# Altium PCB CH340G_VCC.PcbDoc
Units mm, origin at the board's own origin, x right, y up, seen from the top; angles counter-clockwise.
Board outline 41.53 x 19.18 mm, 2 copper layers (Top Layer, Bottom Layer); 36 components, 24 nets, 124 pads, 51 vias.
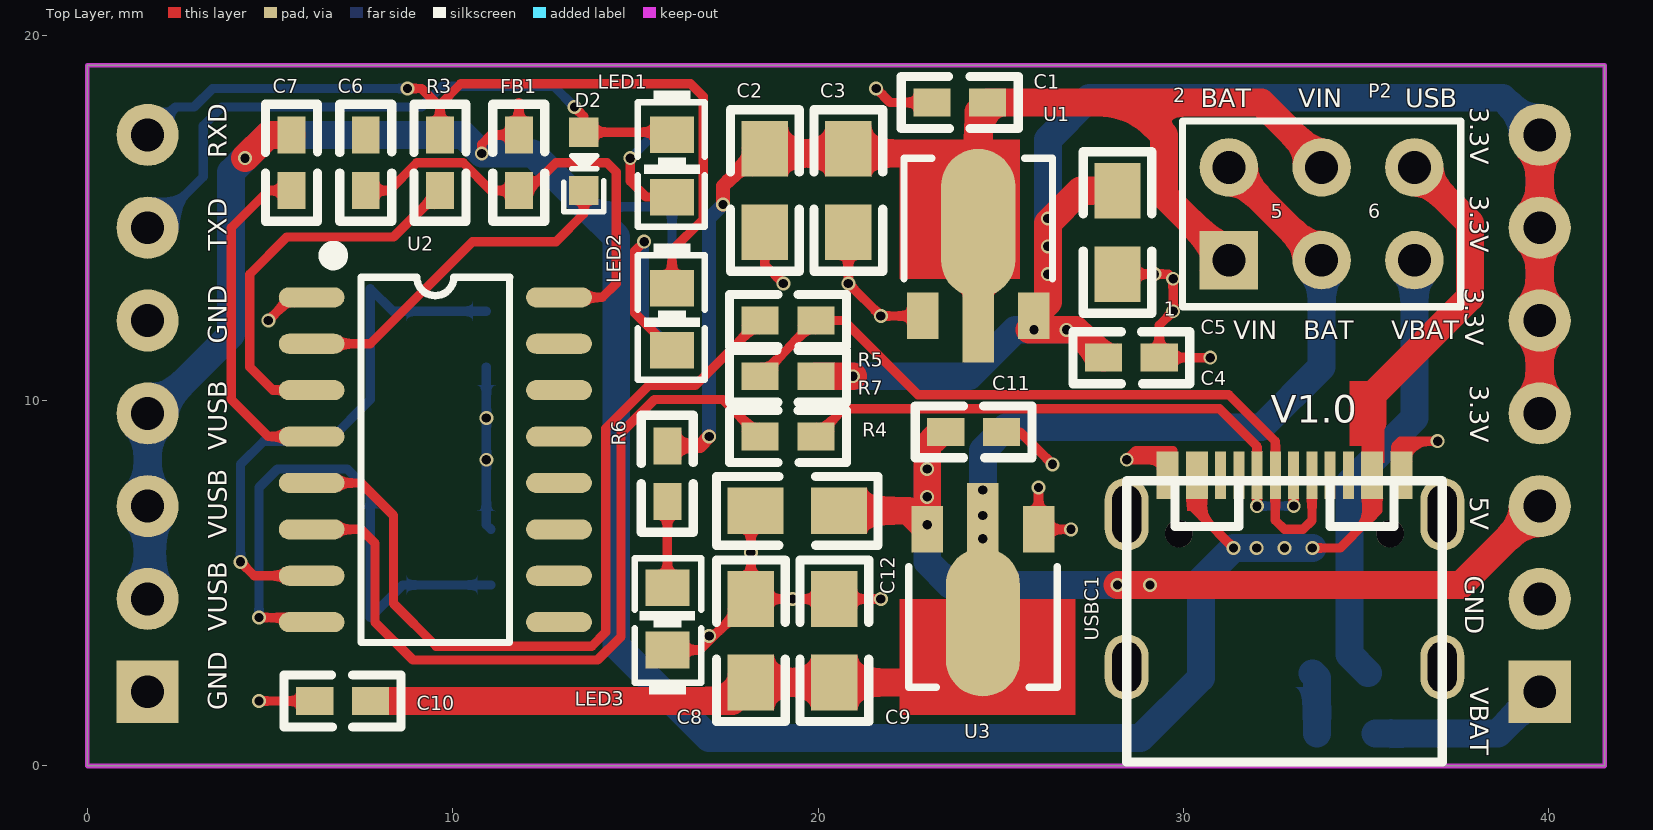
[diagram p0: Top Layer view]
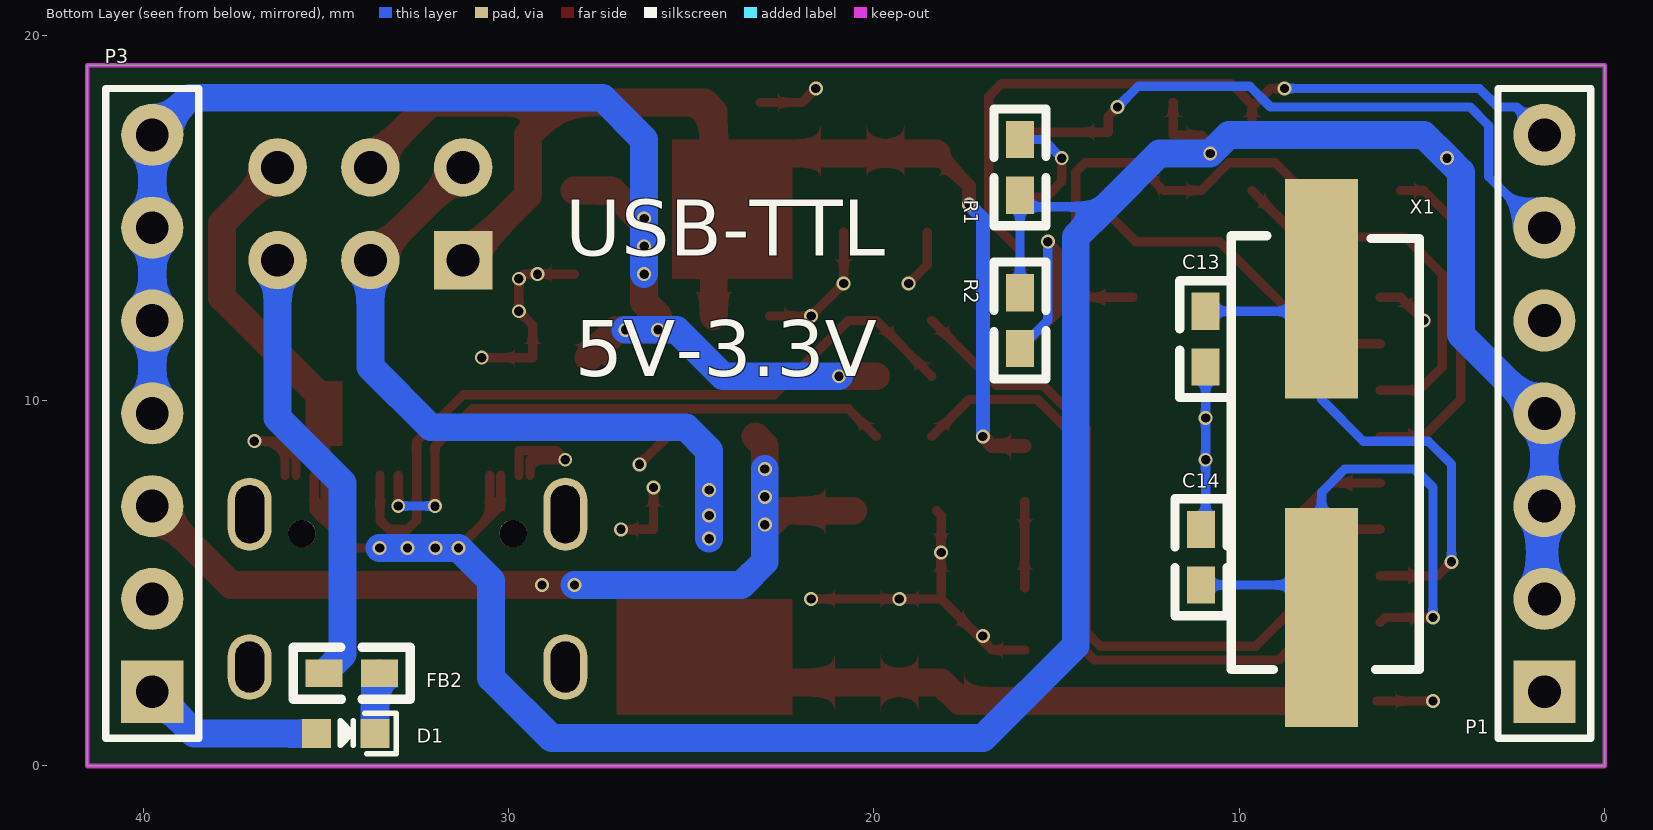
[diagram p1: Bottom Layer view, seen from below]

## Layer stack, top to bottom
Top Solder: solder mask 0.0102, Solder Resist, Dk 3.5
Top Layer: signal copper 0.0356
Dielectric 1: dielectric 0.32, FR-4, Dk 4.8
Bottom Layer: signal copper 0.0356
Bottom Solder: solder mask 0.0102, Solder Resist, Dk 3.5

## Board outline
0,0 41.529,0 41.529,19.177 0,19.177

## Design rules (kind name [scope] priority, off if disabled: settings)
Clearance [All] p1: gap=0.127 ignorepadtopadclearanceinfootprint=TRUE
PolygonConnect [All] p1: connectstyle=Relief reliefconductorwidth=0.254 reliefentries=4 polygonreliefangle="90 Angle" airgapwidth=0.254
RoutingVias [All] p1: holewidth=0.711 width=1.27 viastyle="Through Hole" minholewidth=0.711 minwidth=1.27 maxholewidth=0.711 maxwidth=1.27
SolderMaskExpansion [All] p1: expansion=0.102
Width [All] p1: maxlimit=1.27 minlimit=0.254 preferedwidth=0.254
30 further rules are at their usual default settings.

## Components (designator, comment, footprint, x,y, rotation, side; value= is the part's Value field where it differs from the comment)
C1 "CC0603KRX7R9BB104" C0603_QB 23.066,18.164 r0 top value="100nF, 50V"
C2 "CC0603KRX7R9BB104" C0805_1.25mm_QB 18.542,14.605 r90 top value="22uF, 50V"
C3 "CC0603KRX7R9BB104" C0805_1.25mm_QB 20.828,14.605 r90 top value="22uF, 50V"
C4 "CC0603KRX7R9BB104" C0603_QB 29.385,11.173 r180 top value="100nF, 50V"
C5 "CC0603KRX7R9BB104" C0805_1.25mm_QB 28.194,13.462 r90 top value="22uF, 50V"
C6 "CC0603KRX7R9BB104" C0603_QB 7.623,17.32 r270 top value=0.1uF
C7 "CC0603KRX7R9BB104" C0603_QB 5.591,17.32 r270 top value="100nF, 50V"
C8 "CC0603KRX7R9BB104" C0805_1.25mm_QB 18.161,4.572 r270 top value="22uF, 50V"
C9 "CC0603KRX7R9BB104" C0805_1.25mm_QB 20.447,4.572 r270 top value="22uF, 50V"
C10 "CC0603KRX7R9BB104" C0603_QB 6.175,1.781 r0 top value="100nF, 50V"
C11 "CC0603KRX7R9BB104" C0603_QB 25.067,9.141 r180 top value="100nF, 50V"
C12 "CC0603KRX7R9BB104" C0805_1.25mm_QB 18.288,6.985 r0 top value="22uF, 50V"
C13 "CC0603KRX7R9BB104" C0603_QB 10.925,10.874 r90 bottom value="22pF, 25V"
C14 "CC0603KRX7R9BB104" C0603_QB 11.046,6.525 r270 bottom value="22pF, 25V"
D1 "1N4148" SOD_523_QB 33.655,0.889 r0 bottom
D2 "1N4148" SOD_523_QB 13.589,15.748 r90 top
FB1 "CBG160808U182" FB0603_QB 11.811,17.272 r270 top value=500mA
FB2 "CBG160808U182" FB0603_QB 35.052,2.54 r180 bottom value=500mA
LED1 "19-217/R6C-AL1M2VY/3T" LED_SMT_QB 16.002,15.572 r90 top value=5V，25mA，红色，0603
LED2 "19-217/R6C-AL1M2VY/3T" LED_SMT_QB 16.002,11.381 r90 top value=5V，25mA，红色，0603
LED3 "19-217/R6C-AL1M2VY/3T" LED_SMT_QB 15.875,4.875 r270 top value=5V，25mA，红色，0603
P1 "Hard_5*1" HDR2.54-LI-4P 1.651,5.842 r90 bottom
P2 "Hard-3*2" HDR2.54-LI-2x3P 33.782,15.113 r0 top
P3 "Hard_5*1" HDR2.54-LI-4P 39.751,5.842 r90 bottom
R1 "RC0603JR-07470RL" R0603_QB 16.002,17.145 r270 bottom value=470R
R2 "RC0603JR-07470RL" R0603_QB 16.002,11.43 r90 bottom value=470R
R3 "RC0603JR-07470RL" R0603_QB 9.652,17.272 r270 top value=300
R4 "RC0603JR-07470RL" C0603_QB 19.987,9.014 r180 top value=22R
R5 "RC0603JR-07470RL" C0603_QB 19.987,12.189 r180 top value=22R
R6 "RC0603JR-07470RL" R0603_QB 15.875,8.763 r270 top value=470R
R7 "RC0603JR-07470RL" R0603_QB 18.415,10.668 r0 top value=1.5K
U1 "MD5333(SOT-89)" SOT_89_QB 22.86,12.319 r0 top value=MD5333
U2 "CH340G" SOP16N_N 9.525,8.382 r0 top
U3 "MD5350(SOT-89)" SOT_89_QB 26.035,6.477 r180 top value=MD5350
USBC1 "USB3.1C16PFSMT" TYPE-C-USB-17 32.766,5.334 r0 top
X1 "12MHz" ESB3.68640F20M23_QB 7.747,13.064 r270 bottom value=FC-135,32.768KHz,12.5pF,20ppm

## Footprints (in the part's own frame and the unit in brackets; to place one, negate y for a bottom-side part, rotate by r counter-clockwise, add the part's x,y. Pads: shape width x height; smd on the part's side, far side on the other; paste and mask are expansions set on the pad)
C0603_QB [mil]
  rect 40x30 smd: 1(1.9,-0.1) 2(61.9,-0.1)
  silkscreen extent -31,-28 95,28, body extent 0,-17 64,17, height 35
C0805_1.25mm_QB [mil]
  rect 60x50 smd: 1(0,0) 2(90,0)
  silkscreen extent -42,-37 132,37, body extent 6,-25 85,24, height 49
ESB3.68640F20M23_QB [mm]
  rect 6x2 smd: 1(0,0) 2(9,0)
  silkscreen extent -1.45,-2.47 10.43,2.68, body extent -1.2,-2.25 10.2,2.45, height 3
FB0603_QB [mil]
  rect 40x30 smd: 1(0,0) 2(60,0)
  silkscreen extent -33,-28 93,28, body extent 0,-17 63,17, height 35
HDR2.54-LI-2x3P [mm] "双排排针，3x2脚"
  rect 1.6x1.6 hole 0.9: 1(-2.54,-1.27)
  round 1.6 hole 0.9: 2(-2.54,1.27) 3(0,-1.27) 4(0,1.27) 5(2.54,-1.27) 6(2.54,1.27)
  silkscreen extent -3.81,-2.54 3.81,2.54, body extent -3.81,-2.54 3.81,2.54, height 8.5
HDR2.54-LI-4P [mm] "排针，4脚"
  rect 1.7x1.7 hole 0.9: 1(-3.81,0)
  round 1.7 hole 0.9: 2(-1.27,0) 3(1.27,0) 4(3.81,0) 5(6.35,0) 6(8.89,0) 7(11.43,0)
  silkscreen extent -5.08,-1.27 12.7,1.27, body extent -5.08,-1.27 12.7,1.27, height 8.5
LED_SMT_QB [mm]
  rect 1x1.2 smd: 1(0,0) 2(1.7,0)
  silkscreen extent -0.81,-0.9 2.92,0.93, body extent 0,-0.51 1.78,0.51, height 0.6
R0603_QB [mil]
  rect 40x30 smd: 1(0,0) 2(60,0)
  silkscreen extent -33,-28 93,28, body extent 0,-17 63,17, height 35
SOD_523_QB [mm]
  rect 0.8x0.8 smd: 1(1.6,0) 2(0,0)
  silkscreen extent -0.57,-0.55 0.95,0.55, body extent -0.13,-0.43 1.63,0.43, height 0.65
SOP16N_N [mm] "10.3*7*1.8mm（长宽高）"
  oval 1.8x0.55 smd: 1(-3.385,4.445) 2(-3.385,3.175) 3(-3.385,1.905) 4(-3.385,0.635) 5(-3.385,-0.635) 6(-3.385,-1.905) 7(-3.385,-3.175) 8(-3.385,-4.445) 9(3.385,-4.445) 10(3.385,-3.175) 11(3.385,-1.905) 12(3.385,-0.635) 13(3.385,0.635) 14(3.385,1.905) 15(3.385,3.175) 16(3.385,4.445)
  silkscreen extent -2.95,-5 2.03,5.74, body extent -3.5,-5.25 3.5,5.25, height 1.9
SOT_89_QB [mil]
  rect 34x50 smd: 1(0,0) 3(120,0)
  rect 34x100 smd: 2(60,0)
  oval 80x160 smd: 2(60,100)
  silkscreen extent -20,40 140,170, body extent -29,-12 149,175, height 63
TYPE-C-USB-17 [mm]
  oval 1.2x1.8 hole 0.8 slot 1.4 at 90 deg: 0(-4.32,-2.624) 0(4.32,-2.624)
  oval 1.2x2 hole 0.8 slot 1.6 at 90 deg: 0(-4.32,1.556) 0(4.32,1.556)
  rect 0.3x1.3 smd: A1(-3.35,2.623) A4(-2.55,2.623) A5(-1.25,2.623) A6(-0.25,2.623) A7(0.25,2.623) A8(-1.75,2.624) A9(2.55,2.623) A12(3.35,2.623) B1(3.05,2.623) B4(2.25,2.623) B5(1.75,2.623) B6(0.75,2.623) B7(-0.75,2.623) B8(1.25,2.624) B9(-2.25,2.623) B12(-3.05,2.623)
  round 0.75 hole 0.75 unplated: ""(-2.89,1.026) ""(2.89,1.026)
  silkscreen extent -4.32,-5.23 4.32,2.47

## Part data
C1 C2 C3 C4 C5 C6 C7 C8 C9 C10 C11 C12 C13 C14: library part CAP, "Capacitor", Manufacturer=国巨, PartNo=11002050002
D1 D2: library part diode
FB1 FB2: library part FB, "Inductor", Manufacturer=HOLDER, PartNo_new=11014060007
LED1 LED2 LED3: library part LED, Manufacturer=亿光, PartNo=11004030004
R1 R2 R3 R4 R5 R6 R7: library part Res1, "Resistor", Manufacturer=国巨, PartNo=11003020066
U1: library part MD5333, "LDO", Manufacturer=明达微, PartNo=11001090038
U3: library part MD5350, "LDO", Manufacturer=明达微, PartNo=11001090038
X1: library part XTAL, "Crystal Oscillator", Manufacturer=EPSON, PartNo=11012040004

## Via types
v1: diameter 0.381, hole 0.254, Top Layer to Bottom Layer, 51 vias

## Nets (pads, with @x,y where several pads share a name; then routed paths per layer and width w, separated by ;. In a path a pad name is that pad's centre, name@x,y a point inside that pad or via, vN(x,y) a via of type N, cw(c..) or ccw(c..) an arc to the next point about the centre after c; other vN are vias at no path point)
BAT: C8.2 C9.2 C10.2 P2.2 P2.3 U3.2 | length 36.8
  Top Layer w0.762: C10.2 17.653,1.778 C8.2 C9.2 22.86,2.286 U3.2@24.511,3.937 ; P2.2 P2.3
  Bottom Layer w0.762: v1(24.511,6.223) v1(24.511,6.858) v1(24.511,7.556) 24.511,8.636 25.146,9.271 32.131,9.271 33.782,10.922 P2.3
DN: R4.1 USBC1.A7 USBC1.B7 | length 16.3
  Top Layer w0.254: R4.1 20.701,9.779 30.988,9.779 32.016,8.751 USBC1.B7 v1(32.016,7.112) ; USBC1.A7 33.016,7.12 v1(33.02,7.116)
  Bottom Layer w0.254: v1(32.016,7.112) 32.02,7.116 v1(33.02,7.116)
DP: R5.1 R7.1 USBC1.A6 USBC1.B6 | length 20.7
  Top Layer w0.254: R7.1 R5.1 20.701,12.192 22.733,10.16 31.242,10.16 32.516,8.886 32.516,8.796 USBC1.A6 32.516,6.727 32.766,6.477 33.274,6.477 33.516,6.719 USBC1.B6
GND: C1.1 C2.1 C3.1 C4.1 C5.1 C6.1 C8.1 C9.1 C10.1 C11.1 C12.1 C13.1 C14.1 LED3.2 P1.1 P1.5 P3.2 U1.1 U2.1 U3.1 USBC1.A1 USBC1.A12 USBC1.B1 USBC1.B12 | length 39.6
  Top Layer w0.254: v1(4.699,1.778) C10.1 ; v1(4.953,12.192) 5.588,12.827 U2.1 ; LED3.2 16.764,3.175 C8.1 ; C12.1 18.161,6.858 v1(18.161,5.842) C8.1 ; C2.1 18.542,13.716 v1(19.05,13.208) ; C3.1 v1(20.828,13.208) v1(21.717,12.319) U1.1 ; v1(21.59,18.542) 21.971,18.161 C1.1 ; v1(21.717,4.572) C9.1 v1(19.304,4.572) C8.1 ; C11.1 25.527,9.144 v1(26.416,8.255) ; v1(26.035,7.62) U3.1 v1(26.924,6.477) ; C5.1 v1(29.21,13.462) 29.591,13.462 v1(29.718,13.335) v1(29.718,12.446) 29.337,12.065 C4.1 v1(30.734,11.176) ; USBC1.A1 29.416,8.382 v1(28.448,8.382) 28.702,8.636 29.716,8.636 USBC1.B12 ; USBC1.B1 USBC1.B1@35.816,8.511 ; USBC1.A12 36.116,8.557 36.449,8.89 ; v1(36.957,8.89) 36.449,8.89 ; USBC1.B1@35.816,8.511 36.195,8.89 ; USBC1.B1@35.816,8.511 35.816,8.765 35.941,8.89 36.195,8.89 ; 36.195,8.89 36.449,8.89
  Bottom Layer w0.254: C13.1 v1(10.922,9.525) v1(10.922,8.382) 10.922,6.604 C14.1
  other v1: 17.018,3.556
NetC6_2: C6.2 FB1.2 U2.16 | length 12.7
  Top Layer w0.254: C6.2 8.255,15.748 9.017,16.51 10.287,16.51 11.049,15.748 FB1.2 12.065,15.748 12.827,16.51 14.224,16.51 14.478,16.256 14.478,13.208 14.097,12.827 U2.16
NetC7_2: C7.2 U2.4 | length 9.4
  Top Layer w0.254: C7.2 4.953,15.748 3.937,14.732 3.937,10.033 4.953,9.017 U2.4
NetC13_2: C13.2 U2.7 X1.1 | length 15.5
  Top Layer w0.254: v1(4.191,5.588) 4.572,5.207 U2.7
  Bottom Layer w0.254: v1(4.191,5.588) 4.191,8.255 4.826,8.89 6.604,8.89 7.747,10.033 X1.1 8.365,12.446 C13.2
NetC14_2: C14.2 U2.8 X1.2 | length 15.7
  Top Layer w0.254: v1(4.699,4.064) 6.013,4.064 U2.8
  Bottom Layer w0.254: v1(4.699,4.064) 4.699,7.62 5.207,8.128 7.112,8.128 7.747,7.493 X1.2 8.636,4.953 C14.2
NetD1_2: D1.2 FB2.2 | length 1.7
  Bottom Layer w0.762: FB2.2 33.655,2.413 D1.2
NetD2_2: D2.2 U2.2 | length 9.6
  Top Layer w0.254: U2.2 7.747,11.557 10.541,14.351 12.827,14.351 13.589,15.113 D2.2
NetFB2_1: FB2.1 P2.5 | length 12.2
  Bottom Layer w0.762: FB2.1 34.544,3.048 34.544,7.747 36.322,9.525 P2.5
NetLED1_1: LED1.1 R1.1 | length 3.3
  Top Layer w0.254: v1(14.859,16.637) 14.859,16.002 15.289,15.572 LED1.1
  Bottom Layer w0.254: v1(14.859,16.637) 15.367,17.145 R1.1
NetLED2_1: LED2.1 R2.1 | length 6.7
  Top Layer w0.254: v1(15.24,14.351) 14.986,14.097 14.986,12.397 LED2.1
  Bottom Layer w0.254: v1(15.24,14.351) 15.24,12.192 R2.1
NetLED3_1: LED3.1 R6.2 | length 2.4
  Top Layer w0.254: LED3.1 R6.2
NetR3_2: R3.2 U2.3 | length 10.7
  Top Layer w0.254: U2.3 5.08,10.287 4.445,10.922 4.445,13.462 5.461,14.478 8.382,14.478 R3.2
RXD: LED2.2 P1.7 R3.1 | length 22.7
  Top Layer w0.254: v1(8.763,18.542) 9.144,18.542 9.652,18.034 ; R3.1 9.652,18.034 ; LED2.2 16.002,14.113 16.856,14.967 16.856,18.323 16.51,18.669 10.223,18.669 9.652,18.098 9.652,18.034
  Bottom Layer w0.254: P1.7 2.413,18.034 2.921,18.034 3.429,18.542 v1(8.763,18.542)
TXD: D2.1 LED1.2 P1.6 | length 17.6
  Top Layer w0.254: v1(13.335,18.034) 13.589,17.78 D2.1 15.926,17.348 LED1.2
  Bottom Layer w0.254: P1.6 1.778,14.732 3.175,16.129 3.175,17.526 3.683,18.034 9.144,18.034 9.716,18.605 12.763,18.605 v1(13.335,18.034)
USBD+: R5.2 U2.5 | length 22.5
  Top Layer w0.254: U2.5 7.493,7.747 8.382,6.858 8.382,4.445 9.546,3.281 13.807,3.281 14.191,3.665 14.191,9.238 15.367,10.414 16.637,10.414 R5.2
USBD-: R4.2 U2.6 | length 21.7
  Top Layer w0.254: U2.6 7.493,6.477 7.874,6.096 7.874,3.937 8.911,2.9 13.965,2.9 14.605,3.54 14.605,9.113 15.525,10.033 17.399,10.033 R4.2
VCC3V3: C4.2 C5.2 P3.4 P3.5 P3.6 P3.7 R7.2 U1.3 | length 48
  Top Layer w0.762: R7.2 v1(20.955,10.668) ; U1.3@25.781,11.938 v1(25.908,11.938) v1(26.797,11.938) 27.051,11.938 C4.2 ; U1.3 26.289,12.7 v1(26.289,13.462) v1(26.289,14.224) 26.289,14.859 27.178,15.748 C5.2 ; P3.4 P3.5 P3.6 P3.7
  Bottom Layer w0.762: v1(20.955,10.668) 24.13,10.668 25.4,11.938 v1(25.908,11.938) v1(26.797,11.938) ; v1(26.289,13.462) v1(26.289,14.224) v1(26.289,14.986) 26.289,17.145 27.432,18.288 38.735,18.288 P3.7 P3.6 P3.5 P3.4
VCC5V: C11.2 C12.2 P3.3 U3.3 | length 25.7
  Top Layer w0.762: C12.2 22.479,6.985 U3.3 v1(22.987,6.604) v1(22.987,7.366) v1(22.987,8.128) 22.987,8.763 C11.2@23.241,9.017 ; v1(28.194,4.953) v1(29.083,4.953) 37.592,4.953 P3.3
  Bottom Layer w0.762: v1(22.987,8.128) v1(22.987,7.366) v1(22.987,6.604) 22.987,5.588 23.622,4.953 v1(28.194,4.953)
VCCBAT: D1.1 P3.1 | length 5
  Bottom Layer w0.762: D1.1 38.608,0.889 P3.1
VCCIN: C1.2 C2.2 C3.2 P2.1 P2.4 R6.1 U1.2 | length 37.7
  Top Layer w0.381: R6.1 16.764,8.763 v1(17.018,9.017) ; v1(17.399,15.367) 17.399,15.875 C2.2@18.288,16.764
  Top Layer w0.762: C2.2@18.288,16.764 22.479,16.764 U1.2@24.384,14.859 ; U1.2@24.384,12.319 U1.2@24.384,14.859 ; P2.1 29.464,15.621 29.464,17.272 28.575,18.161 ; P2.4 33.782,16.51 32.131,18.161 28.575,18.161 ; U1.2@24.384,14.859 24.384,17.907 C1.2 28.575,18.161
  Bottom Layer w0.381: v1(17.018,9.017) 17.018,14.986 v1(17.399,15.367)
VCCUSB: C7.1 FB1.1 P1.2 P1.3 P1.4 P2.6 R1.2 R2.2 USBC1.A4 USBC1.A9 USBC1.B4 USBC1.B9 | length 89.2
  Top Layer w0.254: v1(10.795,16.764) 10.795,17.018 11.049,17.272 FB1.1 11.811,18.161 ; USBC1.A4 30.216,7.122 30.516,6.822 ; USBC1.B9 30.516,6.822 ; v1(31.369,5.969) 30.516,6.822 ; v1(33.528,5.969) 34.29,5.969 35.016,6.695 ; 35.016,9.108 USBC1.B4 35.016,6.695 ; USBC1.A9 35.316,6.995 35.016,6.695
  Top Layer w0.762: v1(4.318,16.637) 4.953,17.272 C7.1 ; 35.179,9.398 35.179,10.16 37.846,12.827 37.846,14.859 P2.6
  Bottom Layer w0.254: 13.652,15.303 15.684,15.303 R1.2 R2.2
  Bottom Layer w0.762: P1.2 P1.3 P1.4 1.778,9.652 3.937,11.811 3.937,16.256 v1(4.318,16.637) 4.953,17.272 10.287,17.272 v1(10.795,16.764) 12.192,16.764 13.652,15.303 14.478,14.478 14.478,3.302 17.018,0.762 28.829,0.762 30.48,2.413 30.48,5.08 v1(31.369,5.969) v1(32.004,5.969) v1(32.766,5.969) v1(33.528,5.969) ; P1.2@1.778,4.572 P1.3@1.778,7.112
pads on no net: U2.9 U2.10 U2.11 U2.12 U2.13 U2.14 U2.15 USBC1. USBC1.0 USBC1.A5 USBC1.A8 USBC1.B5 USBC1.B8

## Keep-outs
Keep-Out Layer:
  the board outline again, w0.127

## Other copper
Top Layer:
  rectangle net VCCUSB: 34.925,8.382 35.342,10.033
  rectangle net VCCUSB: 35.088,8.291 35.505,9.942
  rectangle net VCCUSB: 30.099,6.985 30.516,7.366
  rectangle net VCCUSB: 35.016,6.995 35.316,7.326
  rectangle net VCCUSB: 34.544,8.763 35.433,10.541
  rectangle net BAT: 22.225,1.397 27.051,4.572
  rectangle net VCCIN: 22.225,13.335 25.527,17.145
  pour cut-out: 28.194,8.763 36.576,8.763 36.576,6.731 36.322,6.985 28.194,6.985
Multi-Layer:
  pour cut-out: 26.67,7.747 26.67,5.461 26.543,5.334 22.098,5.334 22.098,7.747
  pour cut-out: 26.797,13.335 26.797,11.049 26.67,10.922 22.225,10.922 22.225,13.335

## Silkscreen, mask and mechanical layers (free items; w line width, h text height)
Top Overlay:
  text "BAT" at 30.48,18.034 h0.51
  text "VIN" at 33.147,18.034 h0.51
  text "USB" at 36.068,18.034 h0.51
  text "3.3V" at 37.846,18.034 h0.51 r270
  text "RXD" at 3.81,16.637 h0.51 r90
  text "3.3V" at 37.846,15.621 h0.51 r270
  text "TXD" at 3.81,14.097 h0.51 r90
  text "3.3V" at 37.719,13.081 h0.51 r270
  text "VIN" at 31.369,11.684 h0.51
  text "BAT" at 33.274,11.684 h0.51
  text "VBAT" at 35.687,11.684 h0.51
  text "GND" at 3.81,11.557 h0.51 r90
  text "3.3V" at 37.846,10.414 h0.51 r270
  text "V1.0" at 32.385,9.398 h0.76
  text "VUSB" at 3.81,8.636 h0.51 r90
  text "5V" at 37.846,7.366 h0.51 r270
  text "VUSB" at 3.81,6.223 h0.51 r90
  text "GND" at 37.719,5.207 h0.51 r270
  text "VUSB" at 3.81,3.683 h0.51 r90
  text "VBAT" at 37.846,2.159 h0.51 r270
  text "GND" at 3.81,1.524 h0.51 r90
Bottom Overlay:
  text "USB-TTL" at 28.448,13.97 h1.52
  text "5V-3.3V" at 28.194,10.668 h1.52

## Text inside footprints (layer, text, board x,y; h text height)
P2: Top Overlay "6" at 35.052,14.986 h0.38; Top Overlay "5" at 32.385,14.986 h0.38; Top Overlay "2" at 29.718,18.161 h0.38; Top Overlay "1" at 29.464,12.319 h0.38